# EAGLE board ESP32_ADC_HUB (EAGLE 9.5.1)
REV: C
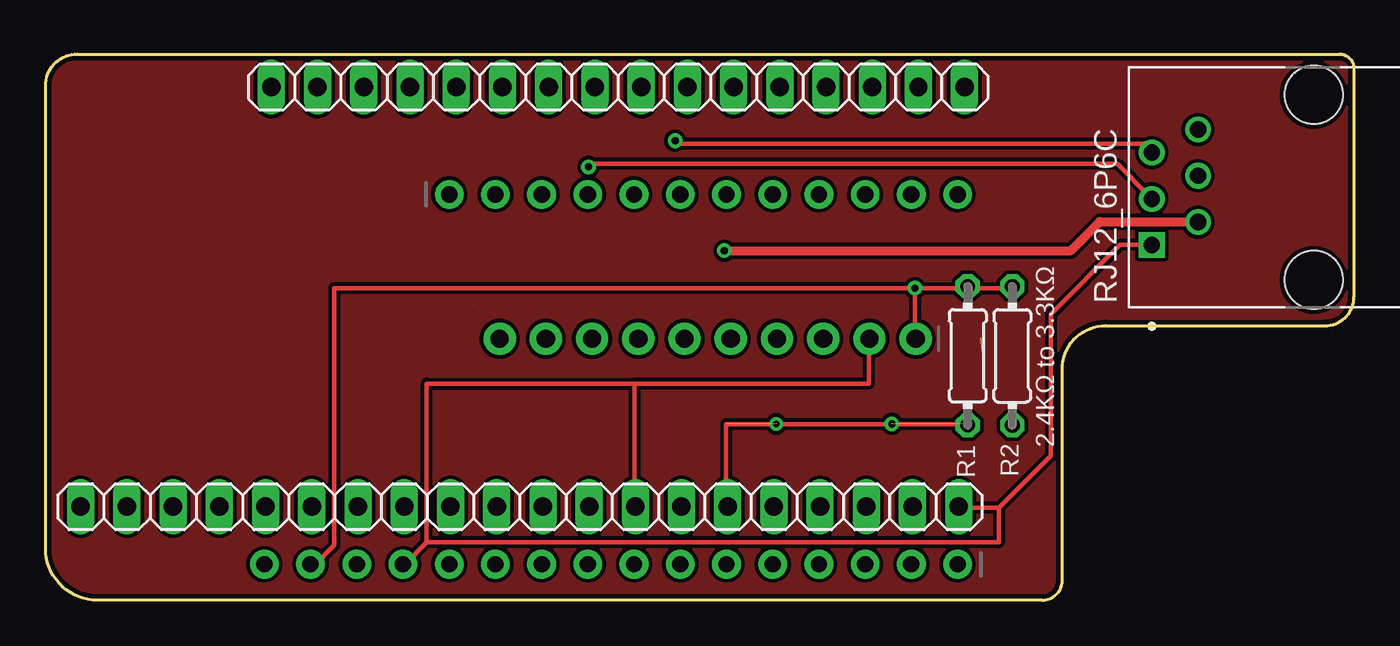
[diagram p0: board, top side]
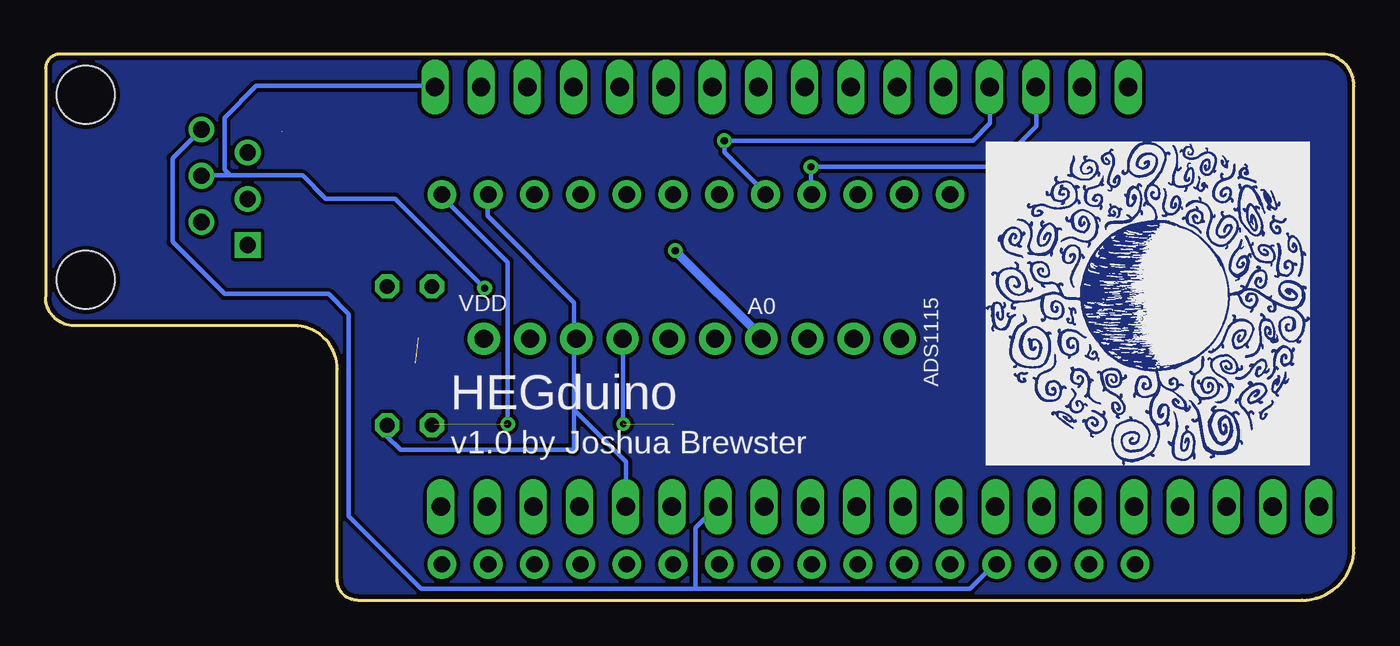
[diagram p1: board, bottom side, seen from below]

Size 71.91 x 30 mm. Coordinates in mm from the lower left corner, seen from the top.
Outline: 2.86,0 arc-90 0,2.86 0,28.26 arc-90 1.75,30 71.12,30 arc-90 71.91,29.21 71.91,16.67 arc-90 70.33,15.08 58.26,15.08 arc90 55.88,12.7 55.88,1.11 arc-90 54.77,0 2.86,0
Copper layers (1*16): Top 0.035mm / dielectric 1.5mm / Bottom 0.035mm
Design rules "adafruit 7-7 *": minimum track width 6mil, minimum drill 15.5mil, track to track 8mil, track to pad 7mil, pad to pad 7mil, via to via 7mil, smd to smd 7mil, copper to edge 10mil, drill to drill 8mil, minimum pad ring 10mil, minimum via ring 8mil, stop-mask expansion 2mil, vias tented up to drill 20mil, thermal gap 10mil

## Footprints (pad centres in the part's own frame; a part is rotated, then mirrored left to right if it is on the bottom)
1X10_ROUND70 = drill 1 pad 1.778: 1 -11.43,0; 2 -8.89,0; 3 -6.35,0; 4 -3.81,0; 5 -1.27,0; 6 1.27,0; 7 3.81,0; 8 6.35,0; 9 8.89,0; 10 11.43,0
1X12_ROUND_MIN = drill 0.9 pad 1.575: 1 -13.97,0; 2 -11.43,0; 3 -8.89,0; 4 -6.35,0; 5 -3.81,0; 6 -1.27,0; 7 1.27,0; 8 3.81,0; 9 6.35,0; 10 8.89,0; 11 11.43,0; 12 13.97,0
1X16_ROUND_MIN = drill 0.9 pad 1.575: 1 -19.05,0; 2 -16.51,0; 3 -13.97,0; 4 -11.43,0; 5 -8.89,0; 6 -6.35,0; 7 -3.81,0; 8 -1.27,0; 9 1.27,0; 10 3.81,0; 11 6.35,0; 12 8.89,0; 13 11.43,0; 14 13.97,0; 15 16.51,0; 16 19.05,0
1X16 = drill 1.016 long: 1 -19.05,0; 2 -16.51,0; 3 -13.97,0; 4 -11.43,0; 5 -8.89,0; 6 -6.35,0; 7 -3.81,0; 8 -1.27,0; 9 1.27,0; 10 3.81,0; 11 6.35,0; 12 8.89,0; 13 11.43,0; 14 13.97,0; 15 16.51,0; 16 19.05,0
1X20 = drill 1.016 long: 1 -24.13,0; 2 -21.59,0; 3 -19.05,0; 4 -16.51,0; 5 -13.97,0; 6 -11.43,0; 7 -8.89,0; 8 -6.35,0; 9 -3.81,0; 10 -1.27,0; 11 1.27,0; 12 3.81,0; 13 6.35,0; 14 8.89,0; 15 11.43,0; 16 13.97,0; 17 16.51,0; 18 19.05,0; 19 21.59,0; 20 24.13,0
0204/7 = drill 0.813 octagon: 1 -3.81,0; 2 3.81,0
ASSMANN_A-2004-1-4-LP-N-R = drill 0.9 square: 1 -3.175,8.89 | drill 0.9: 2 -1.905,6.35; 3 -0.635,8.89; 4 0.635,6.35; 5 1.905,8.89; 6 3.175,6.35 | hole 3.2: -5.08,0; 5.08,0

## Placement (x,y rotation side)
ADS1115  [1X10_ROUND70]  36.39,14.36 180 top
HUZZAH32_A  [1X12_ROUND_MIN]  36.16,22.3 0 top
HUZZAH32_B  [1X16_ROUND_MIN]  31.08,1.98 180 top
LOLIN32_V1.0.0_A  [1X16]  31.46,28.19 0 top
LOLIN32_V1.0.0_B  [1X20]  26.06,5.14 0 top
R1  [0204/7]  50.68,13.43 270 top
R2  [0204/7]  53.13,13.43 270 top
RJ12_6P6C  [ASSMANN_A-2004-1-4-LP-N-R]  69.69,22.68 90 top

## Library data of the parts
ADS1115 = microbuilder
HUZZAH32_A HUZZAH32_B = microbuilder_merge
LOLIN32_V1.0.0_A LOLIN32_V1.0.0_B = pinhead
R1 R2 = resistor
RJ12_6P6C = A-2004-1-4-LP-N-R

## Tracks (layer width: path | path; a pad name or v marks a point on that pad's centre or on a via)
A0  (via drill 0.39)
  Top 0.508: v37.31,19.21 56.36,19.21 57.94,20.8 63.5,20.8
  Bottom 0.508: v37.31,19.21 32.54,14.45
ADC_GND
  Top 0.254: 32.38,11.91 45.24,11.91 45.24,14.29 | 32.38,11.91 32.38,5.08 | 32.38,11.91 20.95,11.91 20.95,3.18 19.84,2.06 19.68,2.06
BOT_COPPER
  pour Bottom: 2.86,0 arc-90 0,2.86 0,3.18 0,28.26 arc-90 1.75,30 1.91,30 71.12,30 arc-90 71.91,29.21 71.91,28.73 71.91,16.67 arc-90 70.33,15.08 70.17,15.08 58.26,15.08 arc90 55.88,12.7 55.88,12.22 55.88,1.11 arc-90 54.77,0 54.29,0
GND_ANA
  Top 0.254: 60.8,19.53 59.05,19.53 55.24,15.72 55.24,7.94 52.39,5.08 | 52.39,5.08 50.16,5.08 | 52.39,5.08 52.39,3.18 20.95,3.18
GND_DIG
  Bottom 0.254: 63.34,25.88 64.93,24.29 64.93,19.69 62.07,16.83 56.36,16.83 55.24,15.72 55.24,4.6 51.28,0.64 36.19,0.64 | 36.19,0.64 36.19,3.97 34.92,5.24 | 36.19,0.64 21.11,0.64 19.68,2.06
S$6  (1 unrouted)
S$8  (1 unrouted)
SCL
  Bottom 0.254: 42.86,10.48 42.86,16.35 47.62,21.11 47.62,22.23 | 42.86,10.48 40,7.62 40,4.76 | 42.86,10.48 42.86,8.25 52.39,8.25 53.18,9.05 53.18,9.52
SDA  (via drill 0.35, 0.39)  (2 unrouted)
  Top 0.254: 50.52,9.67 37.41,9.67 37.41,4.82
  Bottom 0.254: v46.51,9.68 46.51,18.57 50.16,22.23 | 40.16,14.29 v40.16,9.68
TOP_COPPER
  pour Top: 2.86,0 arc-90 0,2.86 0,3.18 0,28.26 arc-90 1.75,30 2.06,30 71.12,30 arc-90 71.91,29.21 71.91,28.58 71.91,16.67 arc-90 70.33,15.08 70.17,15.08 58.26,15.08 arc90 55.88,12.7 55.88,12.22 55.88,1.11 arc-90 54.77,0 54.29,0
VB  (1 unrouted)
VBAT  (via drill 0.39)
  Top 0.254: v47.78,17.15 47.78,14.29 | v47.78,17.15 53.18,17.15 | v47.78,17.15 15.87,17.15 15.87,3.02 14.76,1.91 14.6,1.91
  Bottom 0.254: v47.78,17.15 52.7,22.07 56.51,22.07 57.78,23.34 61.75,23.34 | 61.75,23.34 62.07,23.65 62.07,26.51 60.32,28.26 50.48,28.26 | 61.75,23.34 63.34,23.34
VIR  (via drill 0.39)
  Top 0.254: 60.96,25.08 34.77,25.08 v34.61,25.24
  Bottom 0.254: 20,28.1 20,26.19 20.95,25.24 v34.61,25.24 34.61,24.61 32.38,22.38
VRED  (via drill 0.39)
  Top 0.254: 60.64,22.23 58.9,23.97 30,23.97 v29.84,23.81
  Bottom 0.254: 17.46,28.1 17.46,26.04 19.68,23.81 v29.84,23.81 29.84,22.23

## Text on the board
tPlace: 2.4KΩ to 3.3KΩ
bPlace: HEGduino | v1.0 by Joshua Brewster | C:/Users/crazy/Desktop/soliciting/MaxEntFiltered.bmp
bNames: A0 | VDD